# Altium PCB UmbilicalBoardV4.PcbDoc (part 2 of 2)
Units mm, origin at the board's own origin, x right, y up, seen from the top; angles counter-clockwise.
Board outline 89.1 x 92.94 mm, 4 copper layers (Top Layer, GndPlane, PowerPlane, Bottom Layer), stack 0.107 mm thick; 73 components, 81 nets, 472 pads, 101 vias.
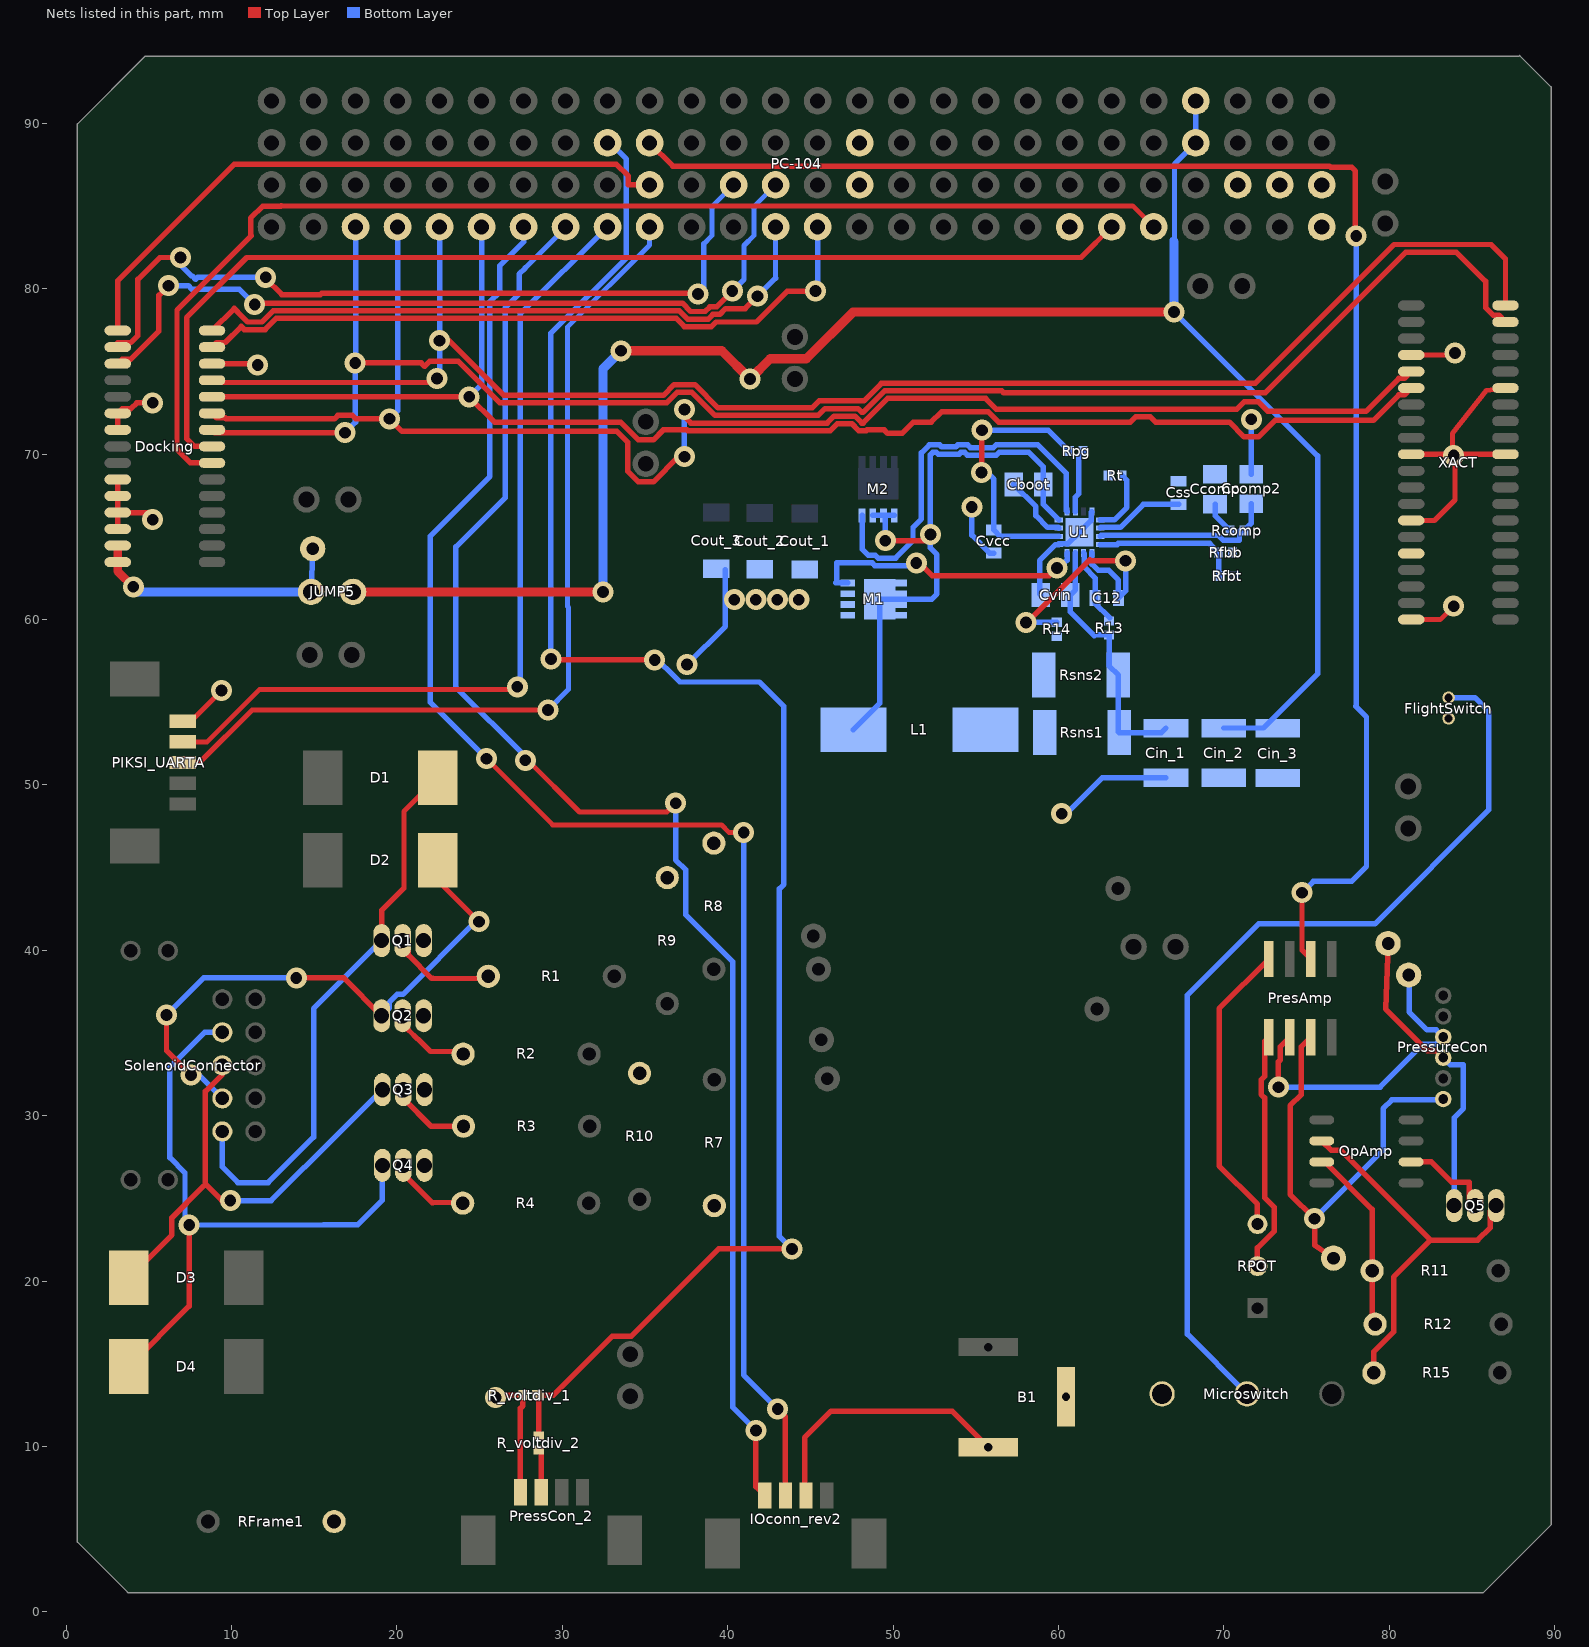
[diagram p4: the nets of this part, all layers, seen from the top]

## Via types
v1: diameter 1.27, hole 0.711, Top Layer to Bottom Layer, 97 vias
v2: diameter 5, hole 3.048, Top Layer to Bottom Layer, 4 vias

## Nets (pads, with @x,y where several pads share a name; then routed paths per layer and width w, separated by ;. In a path a pad name is that pad's centre, name@x,y a point inside that pad or via, vN(x,y) a via of type N, cw(c..) or ccw(c..) an arc to the next point about the centre after c; other vN are vias at no path point) (continued)
GOM_GND_1: B1.0 B1.1 Ccomp2.2 Ccomp.2 Cin_1.2 Cin_2.2 Cin_3.2 Cout_1.2 Cout_2.2 Cout_3.2 Css.1 Cvcc.2 Cvin.2 Docking.A6 Docking.A7 Docking.A10 Docking.A11 Docking.A12 Docking.A13 Docking.A18 FlightSwitch.1 IOconn_rev2.3 M1.1 M1.2 M1.3 Microswitch.3 PC-104.H2_29 PIKSI_UARTA.0 PressCon_2.1 Q1.1 Q2.1 Q3.1 Q4.1 R7.1 R8.1 R9.1 R10.1 R_voltdiv_1.1 Rfbb.2 RFrame1.1 Rt.2 U1.9 U1.16 U1.17 XACT.A4 XACT.A10 XACT.A14 XACT.A20 XACT.A26 XACT.A30 | length 89.5
  Top Layer w0.305: PIKSI_UARTA.0@7.042,53.855 7.551,53.855 v1(9.398,55.702) ; XACT.A20@81.331,59.994 83.083,59.994 v1(83.896,60.808) ; XACT.A14@81.331,65.994 82.733,65.994 83.972,67.234 v1@83.972,69.994 ; XACT.A10@81.331,69.994 v1@83.828,69.994 ; XACT.A4@81.331,75.994 83.843,75.994 v1(83.972,76.124) ; XACT.A30@87.031,69.994 v1@83.972,69.994 ; XACT.A26@87.031,73.994 85.89,73.861 83.828,71.255 v1@83.828,69.994 ; v1@83.828,69.994 v1@83.972,69.994
  Top Layer w0.33: Docking.A13@3.124,65.47 Docking.A12@3.124,66.47 ; Docking.A10@3.124,68.47 Docking.A12@3.124,66.47 ; Docking.A7@3.124,71.47 Docking.A6@3.124,72.47 3.405,72.751 3.922,72.751 4.272,73.101 v1(5.232,73.101) v1@5.232,72.949 ; v1(5.232,66.04) 5.08,66.04 4.877,66.243 4.978,66.345 4.853,66.47 Docking.A12@3.124,66.47 ; Docking.A18@8.824,75.47 11.5,75.47 v1(11.582,75.387) ; v1(25.971,12.967) 25.959,12.979 26.086,13.106 R_voltdiv_1.1@27.622,13.106 27.622,12.459 27.472,12.308 PressCon_2.1@27.472,7.229 ; IOconn_rev2.3@44.653,6.807 44.653,10.541 46.253,12.141 53.569,12.141 B1.0@55.753,9.957
  Bottom Layer w0.33: v1(37.541,57.277) 39.858,59.594 Cout_3.2@39.858,63.019 ; v1(54.762,66.802) 54.762,65.1 55.842,64.021 Cvcc.2@56.089,64.021 ; Cvin.2@58.921,61.493 58.864,61.55 58.864,63.556 59.837,64.528 U1.9@60.021,64.528 60.021,64.57 60.563,64.57 U1.17@61.271,65.278 61.978,65.986 61.978,66.486 U1.16@62.021,66.528 ; v1(60.198,48.26) 60.477,48.26 62.662,50.444 Cin_1.2@66.503,50.444 ; v1@71.628,72.136 v1(71.659,72.105) Ccomp2.2@71.659,68.796
  other v1: 40.4,61.2 41.7,61.2 43,61.2 44.3,61.2 83.896,69.926
GPIO3: Docking.A3 PC-104.H1_26 | length 49.1
  Top Layer w0.33: Docking.A3@3.124,75.47 3.405,75.751 3.922,75.751 5.613,77.442 5.613,79.604 v1(6.198,80.188) ; v1(11.405,79.045) 11.493,79.134 37.257,79.134 37.765,78.626 38.638,78.626 38.918,78.905 39.332,78.905 v1(40.284,79.858)
  Bottom Layer w0.305: 40.988,82.612 41.605,83.228 41.605,84.937 41.58,84.963 PC-104.H1_26@42.901,86.284
  Bottom Layer w0.33: v1(6.198,80.188) 7.391,80.188 7.595,79.985 10.465,79.985 v1(11.405,79.045) ; v1(40.284,79.858) 40.988,80.561 40.988,82.612
GPIO_ADC_NEWPRESS: PC-104.H2_17 R_voltdiv_1.2 R_voltdiv_2.2 | length 104.2
  Top Layer w0.33: R_voltdiv_2.2@28.575,10.63 28.575,12.992 R_voltdiv_1.2@28.461,13.106 29.464,13.106 33.02,16.662 34.163,16.662 39.446,21.946 v1(43.891,21.946) ; v1(29.312,57.607) 29.362,57.556 v1(35.585,57.556)
  Bottom Layer w0.33: v1(29.312,57.607) 29.312,77.311 33.871,81.87 33.871,87.846 32.893,88.824 PC-104.H2_17@32.741,88.824 ; v1@35.373,57.954 37.105,56.223 41.923,56.223 43.396,54.75 43.396,43.988 43.129,43.721 43.129,22.708 v1(43.891,21.946)
GPIO_ADC_OLDPRESS: PC-104.H2_19 PresAmp.6 | length 94.5
  Top Layer w0.33: PC-104.H2_19@35.281,88.824 36.691,87.414 76.389,87.414 76.452,87.351 77.724,87.351 77.953,87.122 v1@77.953,83.185 ; v1(74.727,43.485) 74.727,40.005 PresAmp.6@75.26,39.472
  Bottom Layer w0.33: v1(74.727,43.485) 75.413,44.171 77.724,44.171 78.626,45.072 78.626,54.1 77.978,54.747 78.003,54.773 v1(78.003,83.185)
NetC12_1: C12.1 R14.2 U1.5 | length 15.7
  Top Layer w0.33: v1(58.039,59.817) 58.107,59.817 61.892,63.602 61.943,63.551 v1(64.059,63.551)
  Bottom Layer w0.33: v1(58.039,59.817) 58.052,59.83 R14.2@59.899,59.83 ; U1.5@62.021,64.028 62.021,63.354 62.408,62.967 63.043,62.967 63.627,62.382 C12.1@63.627,61.297 ; C12.1@63.62,61.29 C12.1@63.627,61.297 ; v1(64.059,63.551) 64.059,61.729 C12.1@63.627,61.297
NetC12_2: C12.2 R13.2 U1.6 | length 4.6
  Bottom Layer w0.33: U1.6@61.521,64.028 61.563,63.985 61.563,63.164 62.218,62.509 62.223,62.509 C12.2@62.223,61.29 62.223,60.98 R13.2@63.094,60.109
NetCboot_1: Cboot.1 L1.2 M1.5 M1.6 M1.7 M1.8 M1.9 M2.1 M2.2 M2.3 U1.12 | length 37.6
  Top Layer w0.33: v1(49.53,64.77) 51.892,64.77 v1(52.26,65.138)
  Bottom Layer w0.33: L1.2@47.599,53.34 49.186,54.927 M1.9@49.186,61.239 52.349,61.239 52.654,61.544 52.654,63.932 52.26,64.325 v1(52.26,65.138) 52.26,69.964 52.4,70.104 52.625,70.104 52.739,69.99 53.991,69.99 54.106,70.104 54.327,70.104 54.492,69.939 56.252,69.939 56.417,70.104 58.217,70.104 59.093,69.228 Cboot.1@59.093,68.174 59.093,66.956 U1.12@60.021,66.028 ; M2.3@48.773,66.294 M2.2@49.423,66.294 ; v1(49.53,64.77) 49.53,66.187 M2.2@49.423,66.294 ; M2.1@50.073,66.294 M2.2@49.423,66.294
NetCboot_2: Cboot.2 U1.11 | length 4.1
  Bottom Layer w0.33: Cboot.2@57.29,68.174 58.636,66.827 58.636,66.279 59.344,65.571 59.978,65.571 U1.11@60.021,65.528
NetCcomp2_1: Ccomp2.1 Rcomp.1 U1.3 | length 11.2
  Bottom Layer w0.33: U1.3@62.521,65.028 62.578,65.086 69.673,65.086 69.976,64.783 70.948,64.783 70.948,65.38 Rcomp.1@71.215,65.38 71.659,65.824 Ccomp2.1@71.659,66.993
NetCcomp_1: Ccomp.1 Rcomp.2 | length 2
  Bottom Layer w0.33: Ccomp.1@69.475,66.967 69.475,66.281 Rcomp.2@70.376,65.38
NetCss_2: Css.2 U1.2 | length 5.3
  Bottom Layer w0.33: U1.2@62.521,65.543 62.548,65.571 63.742,65.571 65.138,66.967 Css.2@67.265,66.967
NetCvcc_1: Cvcc.1 Rpg.1 U1.10 | length 16.6
  Top Layer w0.33: v1(55.347,68.885) 55.499,69.037 55.372,69.164 v1(55.372,71.45)
  Bottom Layer w0.33: v1(55.347,68.885) 55.702,68.885 56.089,68.498 Cvcc.1@56.089,65.418 56.479,65.028 U1.10@60.021,65.028 ; v1(55.372,71.45) 59.378,71.45 Rpg.1@60.648,70.18
NetD1_1: D1.1 Q1.3 SolenoidConnector.2 | length 34
  Top Layer w0.305: 20.422,43.764 20.422,48.392 D1.1@22.474,50.444
  Top Layer w0.33: Q1.3@19.075,40.589 19.075,42.418 20.422,43.764
  Bottom Layer w0.33: SolenoidConnector.2@9.449,29.045 9.449,26.899 10.389,25.959 12.217,25.959 14.961,28.702 14.961,36.474 Q1.3@19.075,40.589
NetD2_1: D2.1 Q2.3 SolenoidConnector.4 | length 33.4
  Top Layer w0.305: D2.1@22.474,44.226 v1(24.968,41.732)
  Top Layer w0.33: v1(6.071,36.093) 6.071,33.934 v1(7.544,32.461) ; v1(13.919,38.329) 16.789,38.329 Q2.3@19.075,36.043
  Bottom Layer w0.33: v1(6.071,36.093) 8.306,38.329 v1(13.919,38.329) ; v1(7.544,32.461) 8.033,32.461 SolenoidConnector.4@9.449,31.045 ; Q2.3@19.075,36.043 19.553,36.521 19.553,36.871 20.017,37.335 20.368,37.335 v1@24.765,41.732
NetD3_1: D3.1 Q3.3 SolenoidConnector.6 | length 29.8
  Top Layer w0.305: D3.1@3.789,20.193 D3.1@3.789,21.128
  Top Layer w0.33: D3.1@3.789,20.193 6.388,22.792 6.388,23.83 8.259,25.701 ; SolenoidConnector.6@9.449,33.045 9.449,32.501 8.42,31.472 8.42,25.862 9.415,24.867 v1(9.931,24.867)
  Bottom Layer w0.33: v1(9.931,24.867) 12.391,24.867 14.423,26.899 14.453,26.899 Q3.3@19.126,31.572
NetD4_1: D4.1 Q4.3 SolenoidConnector.8 | length 39.1
  Top Layer w0.33: D4.1@3.789,14.834 7.442,18.486 v1(7.442,23.393)
  Bottom Layer w0.305: v1(7.442,23.393) 15.587,23.393
  Bottom Layer w0.33: v1(7.442,23.393) 7.188,23.139 7.188,26.547 6.274,27.461 6.274,32.944 8.375,35.045 SolenoidConnector.8@9.449,35.045 ; 15.587,23.393 17.628,23.393 19.126,24.892 Q4.3@19.126,27
NetDocking_0: Docking.A1 PC-104.H1_20 | length 38.9
  Top Layer w0.33: Docking.A1@3.124,77.47 3.124,80.493 10.173,87.541 33.261,87.541 33.998,86.805 33.998,86.284 PC-104.H1_20@35.281,86.284
NetDocking_1: Docking.A2 PC-104.H1_24 | length 48.4
  Top Layer w0.33: Docking.A2@3.124,76.47 3.124,76.751 3.922,76.751 4.343,77.172 4.343,80.569 5.664,81.89 v1(6.909,81.89) ; v1(12.065,80.696) 12.065,80.62 13.043,79.642 15.372,79.642 15.461,79.731 38.151,79.731 v1(38.202,79.68)
  Bottom Layer w0.305: 38.548,82.711 39.065,83.228 39.065,84.259 39.04,84.285 39.04,84.963 PC-104.H1_24@40.361,86.284
  Bottom Layer w0.33: v1(6.909,81.89) 6.909,81.432 7.569,80.772 7.633,80.772 7.837,80.569 7.964,80.696 v1(12.065,80.696) ; v1(38.202,79.68) 38.548,80.026 38.548,82.711
NetDocking_15: Docking.A16 PC-104.H1_25 | length 39.8
  Top Layer w0.33: Docking.A16@8.824,77.47 10.17,78.816 10.35,78.636 10.35,78.608 10.968,77.991 11.841,77.991 12.527,78.676 37.068,78.676 37.576,78.168 38.828,78.168 39.107,78.448 39.521,78.448 39.877,78.803 41.059,78.803 v1(41.808,79.553)
  Bottom Layer w0.305: PC-104.H1_25@42.738,83.581 PC-104.H1_25@42.901,83.744 42.901,80.645
  Bottom Layer w0.33: v1(41.808,79.553) 42.901,80.645
NetDocking_16: Docking.A17 PC-104.H1_27 | length 42.7
  Top Layer w0.33: Docking.A17@8.824,76.47 9.105,76.751 9.622,76.751 10.592,77.72 10.779,77.533 12.031,77.533 12.716,78.219 36.878,78.219 37.386,77.711 39.017,77.711 39.296,77.991 41.737,77.991 43.604,79.858 v1(45.314,79.858)
  Bottom Layer w0.33: v1(45.314,79.858) 45.314,79.883 45.441,79.756 PC-104.H1_27@45.441,83.744
NetDocking_22: Docking.A23 PC-104.H1_41 | length 67.2
  Top Layer w0.305: 61.366,81.89 PC-104.H1_41@63.221,83.744
  Top Layer w0.33: Docking.A23@8.824,70.47 7.762,70.47 7.29,70.942 7.29,78.257 10.922,81.89 61.366,81.89
NetDocking_23: Docking.A24 PC-104.H1_43 | length 73.8
  Top Layer w0.305: 13.005,85.014 64.491,85.014 PC-104.H1_43@65.761,83.744
  Top Layer w0.33: Docking.A24@8.824,69.47 7.51,69.47 6.706,70.274 6.706,78.715 11.189,83.198 11.164,83.223 11.164,84.265 11.9,85.001 12.941,85.001 12.967,84.976 13.005,85.014
NetFlightSwitch_2: FlightSwitch.2 Microswitch.2 | length 57.2
  Bottom Layer w0.33: Microswitch.2@71.4,13.183 67.793,16.791 67.793,37.287 72.111,41.605 79.129,41.605 86.03,48.506 86.03,54.432 85.187,55.275 FlightSwitch.2@83.591,55.275
NetIOconn_rev2_1: IOconn_rev2.1 PC-104.H1_15 | length 91.4
  Top Layer w0.305: v1(27.762,51.486) 27.915,51.486 31.039,48.362 36.322,48.362 v1(36.855,48.895)
  Top Layer w0.33: v1(41.707,10.973) 41.707,7.569 IOconn_rev2.1@42.24,7.036
  Bottom Layer w0.305: 27.762,81.259 30.201,83.698 PC-104.H1_15@30.201,83.744
  Bottom Layer w0.33: v1(27.762,51.486) 27.762,51.714 23.571,55.905 23.571,64.389 26.543,67.361 26.543,78.839 27.394,79.69 27.394,80.891 27.762,81.259 ; v1(36.855,48.895) 36.855,45.474 37.466,44.863 37.466,42.145 40.311,39.3 40.311,12.368 v1(41.707,10.973)
NetIOconn_rev2_2: IOconn_rev2.2 PC-104.H1_13 | length 94.5
  Top Layer w0.305: v1(25.425,51.587) 29.424,47.588 39.625,47.588 40.096,47.117 v1(40.97,47.117)
  Top Layer w0.33: v1(43.028,12.268) 43.49,11.806 IOconn_rev2.2@43.49,7.036
  Bottom Layer w0.33: v1(25.425,51.587) 22.022,54.991 22.022,65.049 25.629,68.656 25.629,79.218 26.225,79.815 26.225,81.403 27.661,82.838 PC-104.H1_13@27.661,83.744 ; v1@40.932,47.155 v1(40.97,47.117) 40.97,14.326 v1(43.028,12.268)
NetL1_1: L1.1 R14.1 Rsns1.1 Rsns2.1
NetM1_4: M1.4 U1.8 | length 17.2
  Top Layer w0.33: v1(51.41,63.424) 51.587,63.424 52.375,62.636 59.436,62.636 v1(59.919,63.119)
  Bottom Layer w0.33: M1.4@47.269,62.214 46.523,62.214 46.584,62.275 46.584,63.424 48.739,63.424 48.904,63.259 51.244,63.259 v1(51.41,63.424) ; v1(59.919,63.119) 60.046,63.119 60.521,63.594 U1.8@60.521,64.028
NetM2_4: M2.4 U1.13 | length 23.5
  Bottom Layer w0.33: M2.4@48.151,66.294 48.151,64.243 48.512,63.881 48.928,63.881 49.093,63.716 50.152,63.716 51.206,64.77 51.206,65.575 51.714,66.083 51.714,70.079 52.197,70.561 52.814,70.561 52.929,70.447 53.802,70.447 53.916,70.561 54.516,70.561 54.681,70.396 56.063,70.396 56.228,70.561 58.75,70.561 60.477,68.834 60.477,66.571 U1.13@60.521,66.528
NetOpAmp_2: OpAmp.2 Q5.1 R15.2 | length 23.9
  Top Layer w0.33: OpAmp.2@75.921,28.473 76.497,27.897 77.09,27.897 82.508,22.479 ; R15.2@79.07,14.453 79.07,15.74 80.266,16.935 80.266,20.236 82.508,22.479 ; Q5.1@86.462,24.562 86.111,24.211 86.111,23.237 85.352,22.479 82.508,22.479
NetOpAmp_3: OpAmp.3 R11.1 R12.2 | length 11.2
  Top Layer w0.33: OpAmp.3@75.921,27.203 76.107,27.203 78.969,24.342 R11.1@78.969,20.625 78.969,17.577 R12.2@79.146,17.399
NetOpAmp_6: OpAmp.6 Q5.2 | length 5.6
  Top Layer w0.33: OpAmp.6@81.321,27.203 82.55,27.203 83.773,25.981 84.841,25.981 84.841,24.913 Q5.2@85.192,24.562
NetPC-104_H1_39: PC-104.H1_39
NetPC-104_H1_48: PC-104.H1_48
NetPC-104_H1_50: PC-104.H1_50
NetPC-104_H1_51: PC-104.H1_51
NetPC-104_H1_52: PC-104.H1_52
NetPresAmp_1: PresAmp.1 RPOT.2 | length 14.8
  Top Layer w0.33: RPOT.2@72.034,20.904 72.034,22.003 73.054,23.022 73.054,24.463 72.466,25.051 72.466,31.072 72.25,31.288 72.25,32.161 72.466,32.377 72.466,34.493 PresAmp.1@72.72,34.747
NetPresAmp_2: pad.6 PresAmp.2 PressureCon.4 | length 19.5
  Top Layer w0.33: v1(73.304,31.725) 73.304,33.253 73.419,33.367 73.419,34.176 PresAmp.2@73.99,34.747
  Bottom Layer w0.33: v1(73.304,31.725) 79.445,31.725 82.048,34.328 82.837,34.328 PressureCon.4@83.267,34.759 82.837,35.189 82.294,35.189 81.204,36.28 81.204,38.481 pad.6@81.178,38.506
NetPresAmp_3: pad.4 PresAmp.3 PressureCon.1 | length 27.3
  Top Layer w0.33: PresAmp.3@75.26,34.747 74.689,34.176 74.689,31.275 74.016,30.602 74.016,25.248 v1(75.489,23.774) 75.489,22.174 pad.4@76.632,21.387
  Bottom Layer w0.33: v1(75.489,23.774) 79.629,27.915 79.629,30.429 80.162,30.963 83.221,30.963 PressureCon.1@83.267,31.009
NetPresAmp_8: PresAmp.8 RPOT.3 | length 18.2
  Top Layer w0.33: RPOT.3@72.034,23.444 72.034,24.656 69.723,26.968 69.723,36.474 PresAmp.8@72.72,39.472
NetPressCon_2_2: PressCon_2.2 R_voltdiv_2.1 | length 2.6
  Top Layer w0.33: R_voltdiv_2.1@28.575,9.792 28.722,9.645 PressCon_2.2@28.722,7.229
NetPressureCon_3: pad.5 PressureCon.3 Q5.3 | length 18.8
  Top Layer w0.33: pad.5@79.934,40.411 79.781,36.452 82.294,33.939 82.837,33.939 PressureCon.3@83.267,33.509
  Bottom Layer w0.33: PressureCon.3@83.267,33.509 83.698,33.078 84.487,33.078 84.487,30.435 83.922,29.87 Q5.3@83.922,24.562
NetQ1_2: Q1.2 R1.2 | length 6.4
  Top Layer w0.305: 22.155,38.303 R1.2@25.527,38.303
  Top Layer w0.33: Q1.2@20.345,40.589 20.696,40.238 20.696,39.709 22.102,38.303 22.155,38.303
NetQ2_2: Q2.2 R2.2 | length 4.9
  Top Layer w0.305: Q2.2@20.345,36.043 20.345,35.567 20.709,35.203 20.709,35.167 21.24,34.636 21.276,34.636 22.028,33.884 R2.2@24.003,33.884
NetQ3_2: Q3.2 R3.2 | length 4.9
  Top Layer w0.305: 22.13,29.362 R3.2@24.028,29.362
  Top Layer w0.33: Q3.2@20.396,31.572 20.396,31.042 22.076,29.362 22.13,29.362
NetQ4_2: Q4.2 R4.2 | length 4.2
  Top Layer w0.305: 22.181,24.74 R4.2@23.305,24.74
  Top Layer w0.33: Q4.2@20.396,27 20.396,26.47 22.127,24.74 22.181,24.74
NetRfbb_1: Rfbb.1 Rfbt.2 U1.4 | length 8.9
  Bottom Layer w0.33: U1.4@62.521,64.528 63.545,64.528 63.622,64.605 69.139,64.605 Rfbb.1@69.685,64.059 69.685,62.738 Rfbt.2@69.787,62.636
NetRpg_2: Rpg.2 U1.14 | length 3.9
  Bottom Layer w0.33: U1.14@61.021,66.528 61.011,66.538 61.011,67.386 61.239,67.615 61.239,69.933 Rpg.2@61.486,70.18
NetRt_1: Rt.1 U1.1 | length 4
  Bottom Layer w0.33: U1.1@62.521,66.028 63.386,66.028 64.135,66.777 64.135,68.421 Rt.1@63.849,68.707
PWR_EN: PC-104.H1_30
PWR_EN_J2: XACT.A16
SPI_MISO: Docking.A19 PC-104.H1_9 XACT.A21 | length 96.9
  Top Layer w0.33: Docking.A19@8.824,74.47 8.961,74.333 22.187,74.333 v1(22.428,74.574) ; v1(22.581,76.86) 23.165,76.86 26.467,73.558 36.115,73.558 36.763,74.206 38.015,74.206 39.424,72.796 45.11,72.796 45.529,73.215 48.232,73.215 49.299,74.282 71.895,74.282 80.289,82.677 86.157,82.677 87.031,81.803 XACT.A21@87.031,78.994
  Bottom Layer w0.33: v1(22.428,74.574) 22.581,74.727 PC-104.H1_9@22.581,83.744
SPI_MOSI: Docking.A20 PC-104.H1_11 XACT.A6 | length 87.6
  Top Layer w0.33: Docking.A20@8.824,73.47 v1(24.372,73.47) 25.909,71.933 33.533,71.933 34.6,70.866 35.504,70.866 36.114,71.476 37.53,71.476 37.58,71.425 46.21,71.425 46.63,71.844 47.503,71.844 47.922,71.425 48.381,71.425 48.432,71.476 49.462,71.476 49.678,71.26 50.551,71.26 51.224,71.933 52.306,71.933 52.929,72.555 55.758,72.555 56.38,71.933 64.346,71.933 64.676,72.263 65.55,72.263 65.88,71.933 70.34,71.933 71.223,71.051 72.096,71.051 73.093,72.048 79.048,72.048 80.586,73.586 80.923,73.586 XACT.A6@81.331,73.994
  Bottom Layer w0.33: v1(24.372,73.47) 25.121,74.219 PC-104.H1_11@25.121,83.744
SPI_SCK: Docking.A21 PC-104.H1_7 XACT.A5 | length 94.2
  Top Layer w0.33: Docking.A21@8.824,72.47 9.105,72.189 9.622,72.189 9.675,72.136 16.213,72.136 16.429,72.352 17.302,72.352 17.518,72.136 v1(19.558,72.136) 20.32,71.374 33.299,71.374 33.96,70.714 33.96,68.966 34.6,68.326 35.504,68.326 37.028,69.85 v1(37.389,69.85) ; v1@36.932,72.72 37.77,71.882 46.021,71.882 46.44,72.301 47.692,72.301 48.111,71.882 48.192,71.882 49.678,73.368 55.592,73.368 56.239,72.72 70.784,72.72 71.223,73.159 72.096,73.159 72.662,72.593 78.593,72.593 80.586,74.586 80.923,74.586 XACT.A5@81.331,74.994
  Bottom Layer w0.33: v1(19.558,72.136) 20.041,72.619 PC-104.H1_7@20.041,83.744 ; v1(37.389,69.85) v1(37.389,72.695)
SPI_SS: Docking.A22 PC-104.H1_5 XACT.A22 | length 100
  Top Layer w0.33: Docking.A22@8.824,71.47 8.996,71.298 v1(16.866,71.298) ; v1(17.475,75.514) 21.471,75.514 21.674,75.311 21.992,75.628 23.704,75.628 26.231,73.101 36.304,73.101 36.952,73.749 37.825,73.749 39.235,72.339 45.466,72.339 45.885,72.758 47.882,72.758 48.121,72.519 48.182,72.519 49.488,73.825 56.578,73.825 56.693,73.711 72.492,73.711 81.001,82.22 84.049,82.22 85.827,80.442 85.827,78.861 86.286,78.402 86.623,78.402 XACT.A22@87.031,77.994
  Bottom Layer w0.33: v1(16.866,71.298) 17.501,71.933 17.475,71.958 v1(17.475,75.514) 17.475,75.336 17.501,75.311 PC-104.H1_5@17.501,83.744
UART5_RX: PC-104.H1_17 PIKSI_UARTA.1 | length 51.8
  Top Layer w0.305: PIKSI_UARTA.1@7.042,52.605 8.529,52.605 11.703,55.778 v1@27.457,55.778
  Bottom Layer w0.33: v1(27.28,55.931) 27.457,56.109 27.457,78.461 PC-104.H1_17@32.741,83.744
UART5_TX: PC-104.H1_19 PIKSI_UARTA.2 | length 55.3
  Top Layer w0.305: PIKSI_UARTA.2@7.042,51.355 8.07,51.355 11.249,54.534 v1@29.185,54.534
  Bottom Layer w0.305: v1(29.134,54.534) 30.378,55.778 30.378,60.737 30.328,60.787 30.328,77.699 35.281,82.652 PC-104.H1_19@35.281,83.744
V_BAT_1: Cin_1.1 Cin_2.1 Cin_3.1 Cvin.1 JUMP5.1 PC-104.H2_45 PC-104.H2_46 R13.1 Rsns1.2 Rsns2.2 U1.7 | length 127.9
  Top Layer w0.33: v1(32.461,61.671) v1@32.741,61.671
  Top Layer w0.559: JUMP5.1@17.348,61.671 v1(32.461,61.671) ; v1(33.553,76.251) 39.649,76.251 v1(41.351,74.549) 42.57,75.768 44.755,75.768 47.574,78.588 v1(66.98,78.588)
  Bottom Layer w0.33: U1.7@61.021,64.028 61.021,61.79 Cvin.1@60.724,61.493 60.724,60.459 62.154,59.03 62.192,59.068 R13.1@63.068,59.068 63.068,57.194 Rsns2.2@63.62,56.642 63.62,53.213 Rsns1.2@63.671,53.162 66.224,53.162 Cin_1.1@66.503,53.442 ; v1(66.98,78.588) 75.667,69.901 75.667,56.718 72.39,53.442 Cin_2.1@69.983,53.442 ; 66.98,82.842 66.878,82.944 67.018,83.084 67.018,87.541 PC-104.H2_45@68.301,88.824 PC-104.H2_46@68.301,91.364
  Bottom Layer w0.559: v1(32.461,61.671) 32.461,75.159 v1(33.553,76.251) ; v1(66.98,78.588) 66.98,82.842
V_BAT_1_JUMP5: Docking.A14 Docking.A15 JUMP5.2 pad.2 | length 15.9
  Top Layer w0.508: Docking.A14@3.124,64.47 3.124,62.915 v1(4.064,61.976)
  Bottom Layer w0.33: JUMP5.2@14.808,61.671 pad.2@14.91,64.287
  Bottom Layer w0.559: v1@4.368,61.671 JUMP5.2@14.808,61.671
pads on no net: Docking.A25 Docking.A26 Docking.A27 Docking.A28 Docking.A29 Docking.A30 Docking.B1 Docking.B2 Docking.B3 Docking.B4 Docking.B5 Docking.B6 Docking.B7 Docking.B8 Docking.B9 Docking.B10 Docking.B11 Docking.B12 Docking.B13 Docking.B14 Docking.B15 Docking.B16 Docking.B17 Docking.B18 Docking.B19 Docking.B20 Docking.B21 Docking.B22 Docking.B23 Docking.B24 Docking.B25 Docking.B26 Docking.B27 Docking.B28 Docking.B29 Docking.B30 IOconn_rev2.5 IOconn_rev2.6 Microswitch.1 OpAmp.1 OpAmp.5 OpAmp.7 OpAmp.8 PC-104.H1_1 PC-104.H1_2 PC-104.H1_3 PC-104.H1_4 PC-104.H1_6 PC-104.H1_8 PC-104.H1_10 PC-104.H1_12 PC-104.H1_14 PC-104.H1_16 PC-104.H1_18 PC-104.H1_21 PC-104.H1_22 PC-104.H1_23 PC-104.H1_28 PC-104.H1_29 PC-104.H1_31 PC-104.H1_33 PC-104.H1_34 PC-104.H1_35 PC-104.H1_36 PC-104.H1_37 PC-104.H1_38 PC-104.H1_40 PC-104.H1_42 PC-104.H1_44 PC-104.H1_45 PC-104.H1_46 PC-104.H2_1 PC-104.H2_2 PC-104.H2_3 PC-104.H2_4 PC-104.H2_5 PC-104.H2_6 PC-104.H2_7 PC-104.H2_8 PC-104.H2_9 PC-104.H2_10 PC-104.H2_11 PC-104.H2_12 PC-104.H2_18 PC-104.H2_20 PC-104.H2_21 PC-104.H2_22 PC-104.H2_23 PC-104.H2_24 PC-104.H2_30 PC-104.H2_32 PC-104.H2_33 PC-104.H2_34 PC-104.H2_35 PC-104.H2_36 PC-104.H2_37 PC-104.H2_38 PC-104.H2_39 PC-104.H2_40 PC-104.H2_41 PC-104.H2_42 PC-104.H2_43 PC-104.H2_44 PC-104.H2_47 PC-104.H2_48 PC-104.H2_49 PC-104.H2_50 PC-104.H2_51 PC-104.H2_52 PIKSI_UARTA.3 PIKSI_UARTA.5 PIKSI_UARTA.6 PressCon_2.3 PressCon_2.5 PressCon_2.6 PressureCon.5 PressureCon.6 RFrame1.2 RPOT.1 SolenoidConnector.9 SolenoidConnector.10 SolenoidConnector.W1 SolenoidConnector.W2 SolenoidConnector.W3 SolenoidConnector.W4 U1.15 XACT.A1 XACT.A2 XACT.A3 XACT.A7 XACT.A8 XACT.A11 XACT.A12 XACT.A13 XACT.A17 XACT.A18 XACT.A19 XACT.A23 XACT.A24 XACT.A27 XACT.A28 XACT.A29 XACT.A32 XACT.A33 XACT.A34 XACT.A35 XACT.A36 XACT.A37 XACT.A38 XACT.A39 XACT.A40 XACT.B1 XACT.B2 XACT.B3 XACT.B4 XACT.B5 XACT.B6 XACT.B7 XACT.B8 XACT.B9 XACT.B10 XACT.B11 XACT.B12 XACT.B13 XACT.B14 XACT.B15 XACT.B16 XACT.B17 XACT.B18 XACT.B19 XACT.B20 XACT.B21 XACT.B22 XACT.B23 XACT.B24 XACT.B25 XACT.B26 XACT.B27 XACT.B28 XACT.B29 XACT.B30 XACT.B31 XACT.B32 XACT.B33 XACT.B34 XACT.B35 XACT.B36 XACT.B37 XACT.B38 XACT.B39 XACT.B40
copper on no net: | length 120
  Top Layer w0.33: v2(3.526,5.479) 8.679,5.479 ; v1(14.935,80.696) 15.151,80.912 63.767,80.912 v1(64.211,81.356)
  Bottom Layer w0.33: 13.767,85.09 13.767,91.768 14.493,92.494 61.149,92.494 62.091,91.552 62.091,90.896 62.753,90.234 64.351,90.234 ; v1(64.211,81.356) 64.351,81.496 64.351,87.694
  other v2: 83.526,5.479 7.326,91.179 81.026,91.179

## Polygon pours and split planes (outlines as drawn)
GOM_GND_1 on Bottom Layer "BottomLayer_GOM_GND_1" (solid, pour order 44): 75.26,51.562 75.235,51.537 75.235,49.454 64.516,49.454 64.414,49.555 64.668,49.809 64.668,51.562
GOM_GND_1 on Bottom Layer "BottomLayer_GOM_GND_1" (solid, pour order 42): 46.05,64.008 46.076,63.983 46.076,61.925 47.93,61.925 47.981,61.874 47.955,61.849 47.955,59.792 45.517,59.792 45.466,59.741 38.456,59.741 38.456,63.957 38.43,63.983
V_BAT_1 on Bottom Layer "BottomLayer_V_bat_1" (solid, pour order 36): 75.057,54.432 75.057,52.324 74.955,52.222 64.948,52.222 64.948,54.381 64.999,54.432
GOM_GND_1 on Bottom Layer "BottomLayer_GOM_GND_1" (solid, pour order 34): 55.22,64.541 55.22,63.449 55.22,62.954 57.594,62.954 59.08,63.576 59.169,63.665 59.08,63.932 59.411,64.262 59.461,64.313 60.3,64.313 60.3,64.795 60.325,64.821 60.046,64.541 55.423,64.541
GOM_GND_1 on Bottom Layer "BottomLayer_GOM_GND_1" (solid, pour order 32): 61.722,66.675 61.773,66.624 61.773,65.811 62.306,65.811 62.357,65.862 63.195,67.234 63.424,68.961 64.999,68.961 65.126,68.834 66.218,67.742 66.332,67.627 72.72,67.234 72.847,67.361 72.873,67.335 72.873,65.532 72.542,65.532 71.247,64.237 71.196,64.287 70.18,64.287 70.18,63.449 70.206,63.424 70.231,63.449 73.254,63.449 73.254,69.317 72.644,69.926 62.687,69.926 62.687,69.012 61.874,68.199 61.773,68.097 61.773,66.65
+12V_1_JUMP7 on Bottom Layer "BottomLayer_+12V_1" (solid, pour order 26): 46.38,67.361 46.38,64.999 38.456,64.999 38.252,65.202 38.329,65.278 38.329,67.361
NetL1_1 on Bottom Layer "BottomLayer_NetL1_1" (solid, pour order 22): 60.604,58.141 60.604,51.435 60.554,51.384 60.376,51.206 52.934,51.206 52.934,54.839 53.391,55.296 53.442,55.245 57.81,55.245 57.81,57.81 58.268,58.268 59.385,59.385 60.477,59.385 60.604,58.877 60.604,58.496 60.604,58.268 60.681,58.014
ANALOGGND on GndPlane (split plane): 88.72,11.001 88.592,10.874 73.891,10.874 67.185,17.58 67.185,37.589 71.377,41.781 88.72,41.781
GOM_GND_1 on GndPlane (split plane): 88.567,91.209 88.567,42.878 88.389,42.7 70.409,42.7 70.359,42.69 70.317,42.662 65.644,37.988 65.616,37.946 65.606,37.897 65.606,17.297 65.616,17.248 65.644,17.206 73.289,9.56 73.331,9.532 73.357,9.527 73.363,9.501 73.391,9.459 73.433,9.431 73.482,9.421 88.085,9.421 88.085,5.87 84.706,2.492 5.261,2.492 1.704,6.048 1.704,89.583 5.032,92.911 86.865,92.911
no net on GndPlane (split plane): 89.279,91.991 89.279,91.821 89.279,5.469 85.488,1.679 3.945,1.679 1.196,4.428 1.196,89.755 4.987,93.546 87.723,93.546
V_BAT_1 on PowerPlane (split plane): 71.88,91.488 71.88,79.302 69.327,76.749 69.085,76.507 49.987,76.507 49.938,76.497 49.896,76.469 44.765,71.339 44.737,71.297 44.727,71.247 44.727,55.679 42.344,55.679 42.344,68.732 42.334,68.782 42.306,68.824 39.728,71.402 39.728,74.726 44.401,79.399 60.84,79.399 60.846,79.4 60.858,79.398 65.913,79.398 65.963,79.408 66.005,79.436 66.919,80.35 66.947,80.392 66.957,80.442 66.957,92.098 71.27,92.098
+12V_1_JUMP7 on PowerPlane (split plane): 89.279,91.991 89.279,91.821 89.279,5.469 85.488,1.679 3.945,1.679 1.196,4.428 1.196,89.755 4.987,93.546 87.723,93.546

## Other copper
GndPlane (plane layer: these items are gaps in the copper):
  lines w0.254: 73.381,9.652 65.735,17.297 65.735,37.897 70.409,42.57 88.443,42.57 88.697,42.824 88.697,91.262 86.919,93.04 4.978,93.04 1.575,89.637 1.575,5.994 5.207,2.362 84.76,2.362 88.214,5.817 88.214,9.55 73.482,9.55 ; 67.056,17.526 73.838,10.744 88.646,10.744 88.849,10.947 88.849,41.91 71.323,41.91 67.056,37.643 67.056,17.526
PowerPlane (plane layer: these items are gaps in the copper):
  lines w0.254: 60.84,79.529 44.347,79.529 39.599,74.78 39.599,71.349 42.215,68.732 42.215,55.55 44.044,55.55 44.856,55.55 44.856,71.247 49.987,76.378 69.139,76.378 69.418,76.657 72.009,79.248 72.009,91.542 71.323,92.227 66.827,92.227 66.827,80.442 65.913,79.527 60.858,79.527

## Silkscreen, mask and mechanical layers (free items; w line width, h text height)
Top Overlay:
  rectangle: 16.739,10.16 21.615,14.605
  text "GOM_GND_1" at 72.898,73.05 h0.38
  text "GOM_GND_1" at 4.166,71.73 h0.38
  text "V_BAT_1_JUMP5" at 16.434,64.11 h0.38
  text "V_BAT_1" at 31.979,60.401 h0.38
  text "+12V_1" at 1.549,58.42 h0.38
  text "GOM_GND_1" at 8.992,56.769 h0.51
  text "+5V_3_Jump3" at 31.801,53.569 h0.51
  text "GOM_GND_1" at 31.14,44.12 h0.51
  text "ANALOG_GND" at 56.109,43.51 h0.64
  text "+EX" at 78.156,41.072 h0.51
  text "C3" at 46.38,40.208 h0.64
  text "-OUT" at 80.772,39.573 h0.51
  text "C2" at 46.66,38.735 h0.64
  text "3V3_2" at 61.29,34.874 h0.64
  text "S4" at 12.852,34.747 h0.64
  text "C4" at 46.888,34.366 h0.64
  text "S3" at 12.827,32.639 h0.64
  text "C1" at 47.193,32.08 h0.64
  text "S2" at 12.903,30.607 h0.64
  text "S1" at 12.954,28.651 h0.64
  text "+Out" at 75.616,19.99 h0.51
  text "Cornell  / Umbilical Board  / Rev 2" at 16.459,15.113 h1.52
Mechanical 2:
  lines w0.762: 0.305,4.216 ccw(c0.686,4.216) 0.417,3.947 ; 0.305,4.216 ccw(c0.686,4.216) 0.416,3.947 ; 0.305,4.216 0.305,89.967 ; 0.305,89.967 cw(c0.686,89.967) 0.416,90.236 0.417,90.237 ; 0.305,89.967 cw(c0.686,89.967) 0.417,90.237 ; 0.417,3.947 3.439,0.925 ; 0.416,3.947 0.417,3.947 ; 0.417,90.237 4.505,94.325 ; 3.439,0.925 ccw(c3.708,1.194) 3.439,0.924 ; 3.439,0.924 ccw(c3.708,1.194) 3.439,0.924 ; 3.439,0.924 3.464,0.899 ; 3.439,0.924 3.439,0.924 ; 3.439,0.925 3.439,0.924 ; 3.464,0.899 ccw(c3.734,1.168) 3.734,0.787 ; 3.464,0.899 ccw(c3.734,1.168) 3.734,0.787 ; 3.464,0.899 3.464,0.899 ; 3.734,0.787 84.506,0.787 85.7,0.787 ; 4.505,94.325 cw(c4.775,94.056) 4.775,94.437 ; 4.506,94.326 cw(c4.775,94.056) 4.775,94.437 ; 4.505,94.325 4.506,94.326 ; 4.775,94.437 4.801,94.437 87.694,94.437 ; 85.7,0.787 ccw(c85.7,1.168) 85.969,0.899 ; 85.7,0.787 ccw(c85.7,1.168) 85.969,0.899 85.969,0.899 ; 85.969,0.899 90.058,4.988 ; 87.694,94.437 cw(c87.884,94.107) 88.153,94.376 88.154,94.376 ; 87.694,94.437 cw(c87.884,94.107) 88.154,94.376 ; 88.154,94.376 90.058,92.472 ; 90.058,4.988 ccw(c89.789,5.258) 90.17,5.258 ; 90.058,4.988 ccw(c89.789,5.258) 90.17,5.258 ; 90.058,4.988 90.058,4.988 ; 90.058,92.472 cw(c89.789,92.202) 90.17,92.202 ; 90.058,92.472 90.058,92.471 cw(c89.789,92.202) 90.17,92.202 ; 90.17,5.258 90.17,91.821 90.17,92.202
Drill Drawing:
  text ".Legend" at 67.386,-4.216 h1.52

## Dimensions
0.417,90.237 to 90.17,92.202 on Dimensions

## Text inside footprints (layer, text, board x,y; h text height)
B1: Top Overlay "-" at 51.553,9.232 h1.52; Top Overlay "-" at 62.128,12.407 h1.52; Top Overlay "+" at 51.403,15.457 h1.52
PC-104: Mechanical 1 "J1" at 14.961,88.824 h0.76; Top Overlay "52" at 78.021,90.444 h1.52; Top Overlay "51" at 78.021,87.944 h1.52; Top Overlay "52" at 78.121,85.444 h1.52; Top Overlay "51" at 78.121,82.944 h1.52; Top Overlay "2" at 9.881,91.364 h1.52; Top Overlay "1" at 9.881,88.824 h1.52; Top Overlay "2" at 9.881,86.284 h1.52; Top Overlay "1" at 9.881,83.744 h1.52; Top Overlay "H2" at 5.421,88.744 h1.52; Top Overlay "H1" at 5.421,84.744 h1.52
PresAmp: Top Overlay "*" at 71.018,34.493 h1.27 r90; Dimensions "*" at 71.018,34.493 h1.27 r90
SolenoidConnector: Mechanical 1 "J1" at 5.639,32.548 h0.76 r90